# Altium PCB LED OSRAM.PcbDoc
Units mm, origin at the board's own origin, x right, y up, seen from the top; angles counter-clockwise.
Board outline 9.53 x 19.75 mm, 2 copper layers (Top Layer, Bottom Layer); 2 components, 2 nets, 4 pads, 0 vias.
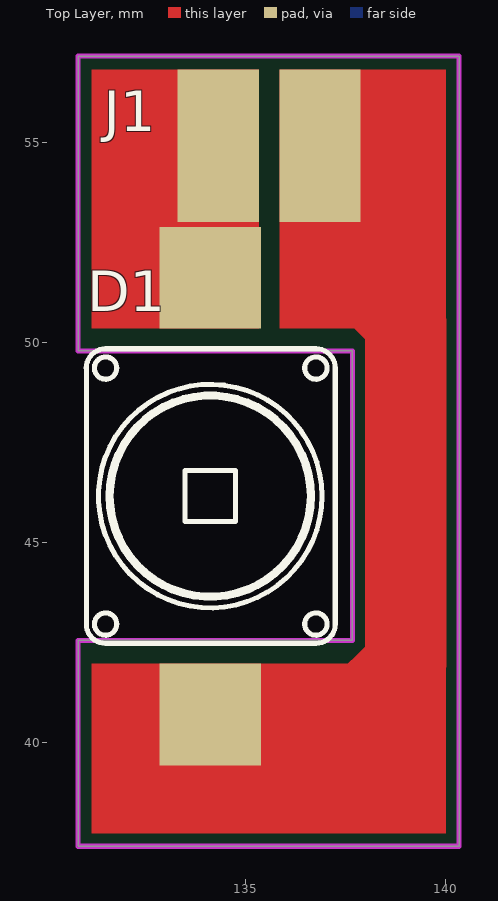
[diagram p0: Top Layer view]
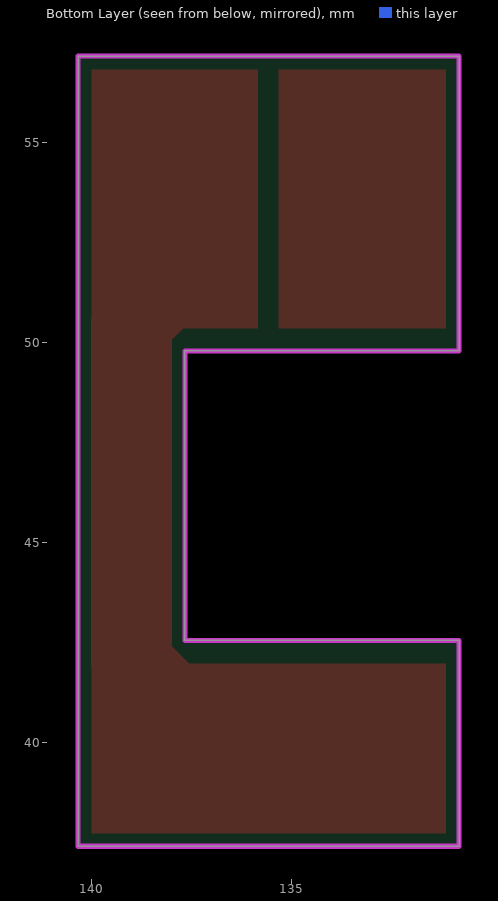
[diagram p1: Bottom Layer view, seen from below]

## Layer stack, top to bottom
Top Solder: solder mask 0.0102, Solder Resist, Dk 3.5
Top Layer: signal copper 0.0356
Dielectric 1: dielectric 0.32, FR-4, Dk 4.8
Bottom Layer: signal copper 0.0356
Bottom Solder: solder mask 0.0102, Solder Resist, Dk 3.5

## Board outline
130.81,37.398 130.81,42.545 137.668,42.545 137.668,49.784 130.81,49.784 130.81,57.15 140.335,57.15 140.335,37.398

## Design rules (kind name [scope] priority, off if disabled: settings)
Clearance [All] p1: gap=0.254 ignorepadtopadclearanceinfootprint=FALSE except(0: Arc-Hole Track-Hole SMDPad-Hole THPad-Hole Via-Hole Fill-Hole Poly-Hole Region-Hole Text-Hole)
ComponentClearance [All] p1 off: gap=0.254 collisioncheckmode=3 verticalgap=0.254 showdistances=FALSE
PolygonConnect [All] p1: connectstyle=Relief reliefconductorwidth=0.254 reliefentries=4 polygonreliefangle="90 Angle" airgapwidth=0.254
RoutingVias [All] p1: holewidth=0.711 width=1.27 viastyle="Through Hole" minholewidth=0.711 minwidth=1.27 maxholewidth=0.711 maxwidth=1.27
SolderMaskExpansion [All] p1: expansion=0.102
Width [All] p1: maxlimit=2.54 minlimit=0.254 preferedwidth=1.016
29 further rules are at their usual default settings.

## Components (designator, comment, footprint, x,y, rotation, side; value= is the part's Value field where it differs from the comment)
D1 "LED dán 0805 RED" OSRAM_GOLDENDRAGON 134.112,51.613 r270 top value=RED
J1 "Jump đực loại cong, 2.54mm 2P" HDR1x2 134.315,54.915 r0 top value=2P

## Footprints (in the part's own frame and the unit in brackets; to place one, negate y for a bottom-side part, rotate by r counter-clockwise, add the part's x,y. Pads: shape width x height; smd on the part's side, far side on the other; paste and mask are expansions set on the pad)
HDR1x2 [mil] "Connector; Header; 2 Position"
  rect 80x150 smd: 1(0,0) 2(100,0)
OSRAM_GOLDENDRAGON [mil]
  rect 100x100 smd: 1(0,0) 2(430,0)
  silkscreen extent 70,-122 360,123, body extent -2,-118 432,118, height 69

## Part data
D1: library part LED0, "Typical INFRARED GaAs LED", Type1="LED dán 0805", Type2="LED chân c?m 3mm", Type3="LED chân c?m 5mm"
J1: library part CON2, Type1="Gi?c xanh lo?i n?m, 300V/16A - 5.08mm", Type2="Jump d?c lo?i th?ng, 2.54mm", Type3=Jumper, Type4="Gi?c xanh lo?i n?m, 300V/16A - 3.81mm", Type5="Jump d?c lo?i cong, 2.54mm"

## Nets (pads, with @x,y where several pads share a name; then routed paths per layer and width w, separated by ;. In a path a pad name is that pad's centre, name@x,y a point inside that pad or via, vN(x,y) a via of type N, cw(c..) or ccw(c..) an arc to the next point about the centre after c; other vN are vias at no path point)
NetD1_1: D1.1 J1.1 | length 3.1
  Top Layer w2.032: D1.1@134.315,51.816 J1.1
NetD1_2: D1.2 J1.2 | length 19.1
  Top Layer w2.032: D1.2@134.264,40.716 137.744,40.716 139.001,41.974 139.001,50.482 136.855,52.629 J1.2

## Keep-outs
Keep-Out Layer:
  the board outline again, w0.127

## Other copper
Top Layer:
  rectangle net NetD1_1: 131.14,50.343 135.331,56.82
  rectangle net NetD1_2: 135.839,50.343 140.005,56.82
  rectangle net NetD1_2: 131.14,37.719 140.005,41.961

## Silkscreen, mask and mechanical layers (free items; w line width, h text height)
Top Solder:
  lines w1.016: 135.001,40.767 137.795,40.767 139.065,42.037 139.065,50.419 136.906,52.578 136.906,53.721